# EAGLE board lm3410-boost-flashlight-driver-20mm-mk-1.3 (EAGLE 7.5.0)
VERSION: v1.2
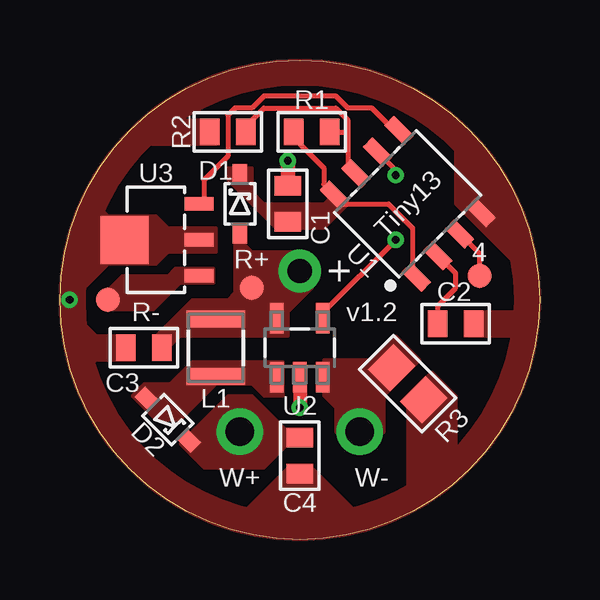
[diagram p0: board, top side]
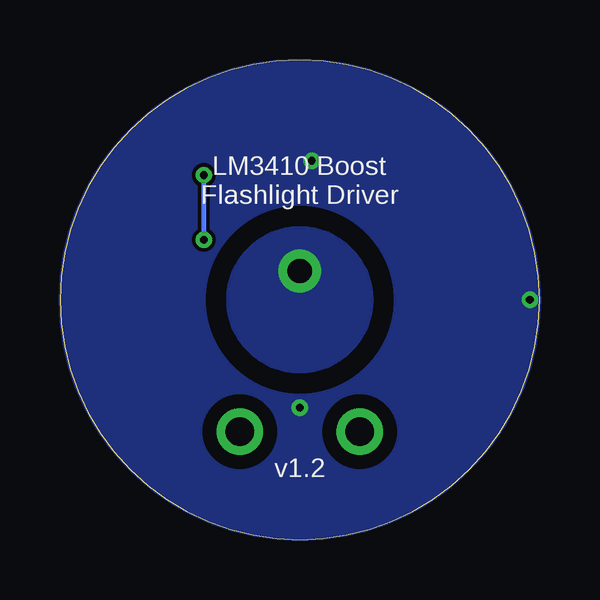
[diagram p1: board, bottom side, seen from below]

Size 20 x 20 mm. Coordinates in mm from the lower left corner, seen from the top.
Outline: 0,10 arc-180 20,10 arc-180 0,10
Copper layers (1*16): Top 0.0356mm / dielectric 1.5011mm / Bottom 0.0356mm
Design rules "LaenPCBOrder2 *": minimum track width 6mil, minimum drill 13mil, track to track 6mil, track to pad 6mil, pad to pad 6mil, via to via 6mil, smd to smd 6mil, copper to edge 0mil, drill to drill 6mil, minimum pad ring 7mil, minimum via ring 7mil, stop-mask expansion 3mil, vias tented up to drill 20mil, thermal gap 10mil
bRestrict: area 6.2,3.2 to 8.8,5.8; area 11.2,3.2 to 13.8,5.8; area 6.5,6.5 to 13.5,13.5

## Footprints (pad centres in the part's own frame; a part is rotated, then mirrored left to right if it is on the bottom)
1X01-SMD-1MM-DIA-NS = smd 1 x 1: P$1 0,0
1X01-1MM-CIR-NS = drill 1.016 pad 1.778: 1 0,0
1X01_NOSILK_NOSTOP = drill 0.33: P$1 0,0
C0603-TIGHTER = smd 0.8 x 1.1: 1 -0.75,0; 2 0.75,0
SOD323-SCHOTTKY = smd 0.8 x 0.6: A -1.25,0; C 1.25,0
PFL2512 = smd 0.7 x 2.45: P$1 -1.2,0; P$2 1.2,0
R0603-TIGHTER = smd 0.8 x 1.1: 1 -0.75,0; 2 0.75,0
R0805 = smd 1.3 x 1.5: 1 -0.95,0; 2 0.95,0
SO08-NARROWER = smd 0.6 x 1.2: 1 -1.905,-2.416; 2 -0.635,-2.416; 3 0.635,-2.416; 4 1.905,-2.416; 5 1.905,2.416; 6 0.635,2.416; 7 -0.635,2.416; 8 -1.905,2.416
SOT95P285X120-5N = smd 1.27 x 0.559: 1 -1.219,0.965; 2 -1.219,0; 3 -1.219,-0.965; 4 1.219,-0.965; 5 1.219,0.965
SOT89-NOTHERM = smd 0.58 x 1.2: 1 -1.5,-1.8; 3 1.5,-1.8; 4@1 0,-1.8 | smd 2 x 2: 4@2 0,1.3
1X01-1.2MM-NS = drill 1.2 pad 1.93: P$1 0,0

## Placement (x,y rotation side)
4  M01SMD-1MM-DIA-NS  [1X01-SMD-1MM-DIA-NS]  17.5,11 0 top
+  M01PTH-1MM-CIR-NS  [1X01-1MM-CIR-NS]  10,11.2 180 top
-  M01NOT-A-VIA-NOPE  [1X01_NOSILK_NOSTOP]  0.4,10 90 bottom
C1  10u  [C0603-TIGHTER]  9.5,14 90 top
C2  1u  [C0603-TIGHTER]  16.5,9 0 top
C3  4u7  [C0603-TIGHTER]  3.5,8 180 top
C4  10u  [C0603-TIGHTER]  10,3.5 270 top
D1  BAT165  [SOD323-SCHOTTKY]  7.5,14 90 top
D2  BAT165  [SOD323-SCHOTTKY]  4.5,5 315 top
FRAME1  FRAME-LETTERNO_PACKAGE  [DUMMY]  0,0 0 top
L1  1uH  [PFL2512]  6.5,8 270 top
R1  19K  [R0603-TIGHTER]  10.5,17 180 top
R2  4K7  [R0603-TIGHTER]  7,17 0 top
R3  0R127  [R0805]  14.5,6.5 135 top
R+  M01SMD-1MM-DIA-NS  [1X01-SMD-1MM-DIA-NS]  8,10.5 0 top
R-  M01SMD-1MM-DIA-NS  [1X01-SMD-1MM-DIA-NS]  2,10 180 top
U1  Tiny13  [SO08-NARROWER]  14.5,14 45 top
U2  LM3410XMF  [SOT95P285X120-5N]  10,8 90 top
U3  '7135  [SOT89-NOTHERM]  4,12.5 90 top
W+  M01PTH-1.2MM-NS  [1X01-1.2MM-NS]  7.5,4.5 270 top
W-  M01PTH-1.2MM-NS  [1X01-1.2MM-NS]  12.5,4.5 180 top

## Library data of the parts
4 + - C1-C4 D1 D2 L1 R1-R3 R+ R- U1 U3 W+ W- = a_parts
FRAME1 = a_parts; DESIGNER: sean@yak.net; VERSION: v1.2
U2 = a_parts; MPN: LM3410XMF; OC_FARNELL: 1685357; OC_NEWARK: 75M6032; PACKAGE: SOT-5; SUPPLIER: National Semiconductor

## Nets
4: 4.P$1 U1.3
GND: -.P$1 C1.2 C2.2 C3.2 C4.2 R2.1 R3.1 U1.4 U2.2 U3.4@1 U3.4@2
N$2: C2.1 U1.2
PWM1: U1.6 U2.4
PWM2: U1.5 U3.3
R-: R-.P$1 U3.1
SW: D2.A L1.P$2 U2.1
VBAT: +.1 C3.1 D1.A L1.P$1 R+.P$1 U2.5
VCC: C1.1 D1.C R1.2 U1.1 U1.8
VDIV: R1.1 R2.2 U1.7
WHITE+: C4.1 D2.C W+.P$1
WHITE-: R3.2 U2.3 W-.P$1

## Tracks (layer width: path | path; a pad name or v marks a point on that pad's centre or on a via)
4
  Top 0.2: 4.P$1 17.5,11.9 U1.3
GND  (via drill 0.33)
  Top 0.575: U2.2 v10,5.5
  Top 0.6: v9.5,15.8 C1.2
  pour Top (isolate 0.152, rank 6, no thermals): 0,10 arc90 10,0 arc90 20,10 19,10 arc-90 10,1 arc-90 1,10
  pour Bottom (isolate 0.152, rank 6, no thermals): 10,0 arc-90 0,10 arc-90 10,20 arc-90 20,10 arc-90
  pour Top (isolate 0.152, rank 6, no thermals): 20,10 arc90 10,20 arc90 0,10 1,10 arc-90 10,19 arc-90 19,10
  pour Top (isolate 0.152, rank 5, no thermals): 7.5,1 9.5,3 10.5,3 12.5,1
  pour Top (isolate 0.152, rank 5, no thermals): 14.5,5.5 14.5,2 15,2 16.5,3.5 16.5,6 15.5,7 14.5,6
  pour Top (isolate 0.152, rank 5, no thermals): 17,9.5 17,8.5 19,8.5 19,9.5
  pour Top (isolate 0.152, rank 5, no thermals): 16.5,14 19,11.5 19,13.5 17.5,15 17.5,15.5 16.5,16.5
  pour Top (isolate 0.152, rank 5, no thermals): 3.5,16.5 6.5,16.5 6.5,17.5 4,17.5 3.5,17
  pour Top (isolate 0.152, rank 5, no thermals): 2,11.5 4,11.5 4.5,12 6.5,12 6.5,13 4.5,13 4,13.5 2,13.5 1.5,14 1,13.5 1,12 0.5,11.5 0.5,10.5 1,10.5
  pour Top (isolate 0.152, rank 5, no thermals): 1,9 1.5,8.5 3.1,8.5 3.1,7.5 1.5,7.5 1,7
N$2
  Top 0.2: C2.1 15.75,9.75 16.5,10.5 16.5,11.1 U1.2
PWM1  (via drill 0.33)
  Top 0.2: v14,12.5 10.96,9.46 U2.4 | U1.6 14,15.4 v14,15.2
  Bottom 0.2: v14,12.5 v14,15.2
PWM2
  Top 0.2: U1.5 13.94,17.06 13,18 12,18 11.5,18.5 8.5,18.5 8,18 7.3,18 7,17.7 7,16 6,15 6,14.2 U3.3
R-
  pour Top (isolate 0.152, rank 5, no thermals): 2,10.4 2.6,11 4.5,11 4.8,11.3 6.4,11.3 6.4,10.7 5,10.7 3.9,9.6 2,9.6
SW
  pour Top (isolate 0.152, rank 5, no thermals): 3,6 4,5 5,5 6.5,6.5 8,6.5 8.5,6 9.3,6 9.3,7.4 5.5,7.4 4.6,6.5 3.5,6.5
VBAT
  pour Bottom (isolate 0.152, no thermals): 7,10 arc-180 13,10 arc-180
  pour Top (isolate 0.152, rank 5, no thermals): 4,8.5 5.5,10 7,10 7.3,10.3 7.3,13 7.7,13 7.7,12.3 8,12 10,12 10.5,11.5 10.5,10.5 9.5,9.5 9.5,8.5 5,8.5 4.5,8 4,8
VCC
  Top 0.2: R1.2 9.75,16.75 11,15.5 11,14.81 U1.8 11.81,14 13.7,14 14.7,13 14.7,11.11 U1.1
  pour Top (isolate 0.152, rank 5, no thermals): 7,15.5 7,15 9,13 11,13 12,14 11.5,14.5 11,14 8.5,14 8,14.5 8,15.5
VDIV
  Top 0.2: R2.2 7.75,17.25 8.5,18 11.5,18 12,17.5 12,17 | 12,17 12,15.6 U1.7 | R1.1 12,17
WHITE+
  pour Top (isolate 0.152, rank 5, no thermals): 5,4 7,6 8,6 9.5,4.5 10.5,4.5 10.5,4 9.5,4 8.5,3 6,3
WHITE-
  pour Top (isolate 0.152, rank 5, no thermals): 11.5,4.5 11.5,5.5 11,6 11,7.5 13,7.5 14,8.5 15,7.5 13.5,6 13.5,4.5 13,4 12,4

## Text on the board
bPlace: LM3410 Boost / Flashlight Driver